# EAGLE board RedBoard-Artemis-ATP-Panel (EAGLE 9.4.2), part 1 of 3
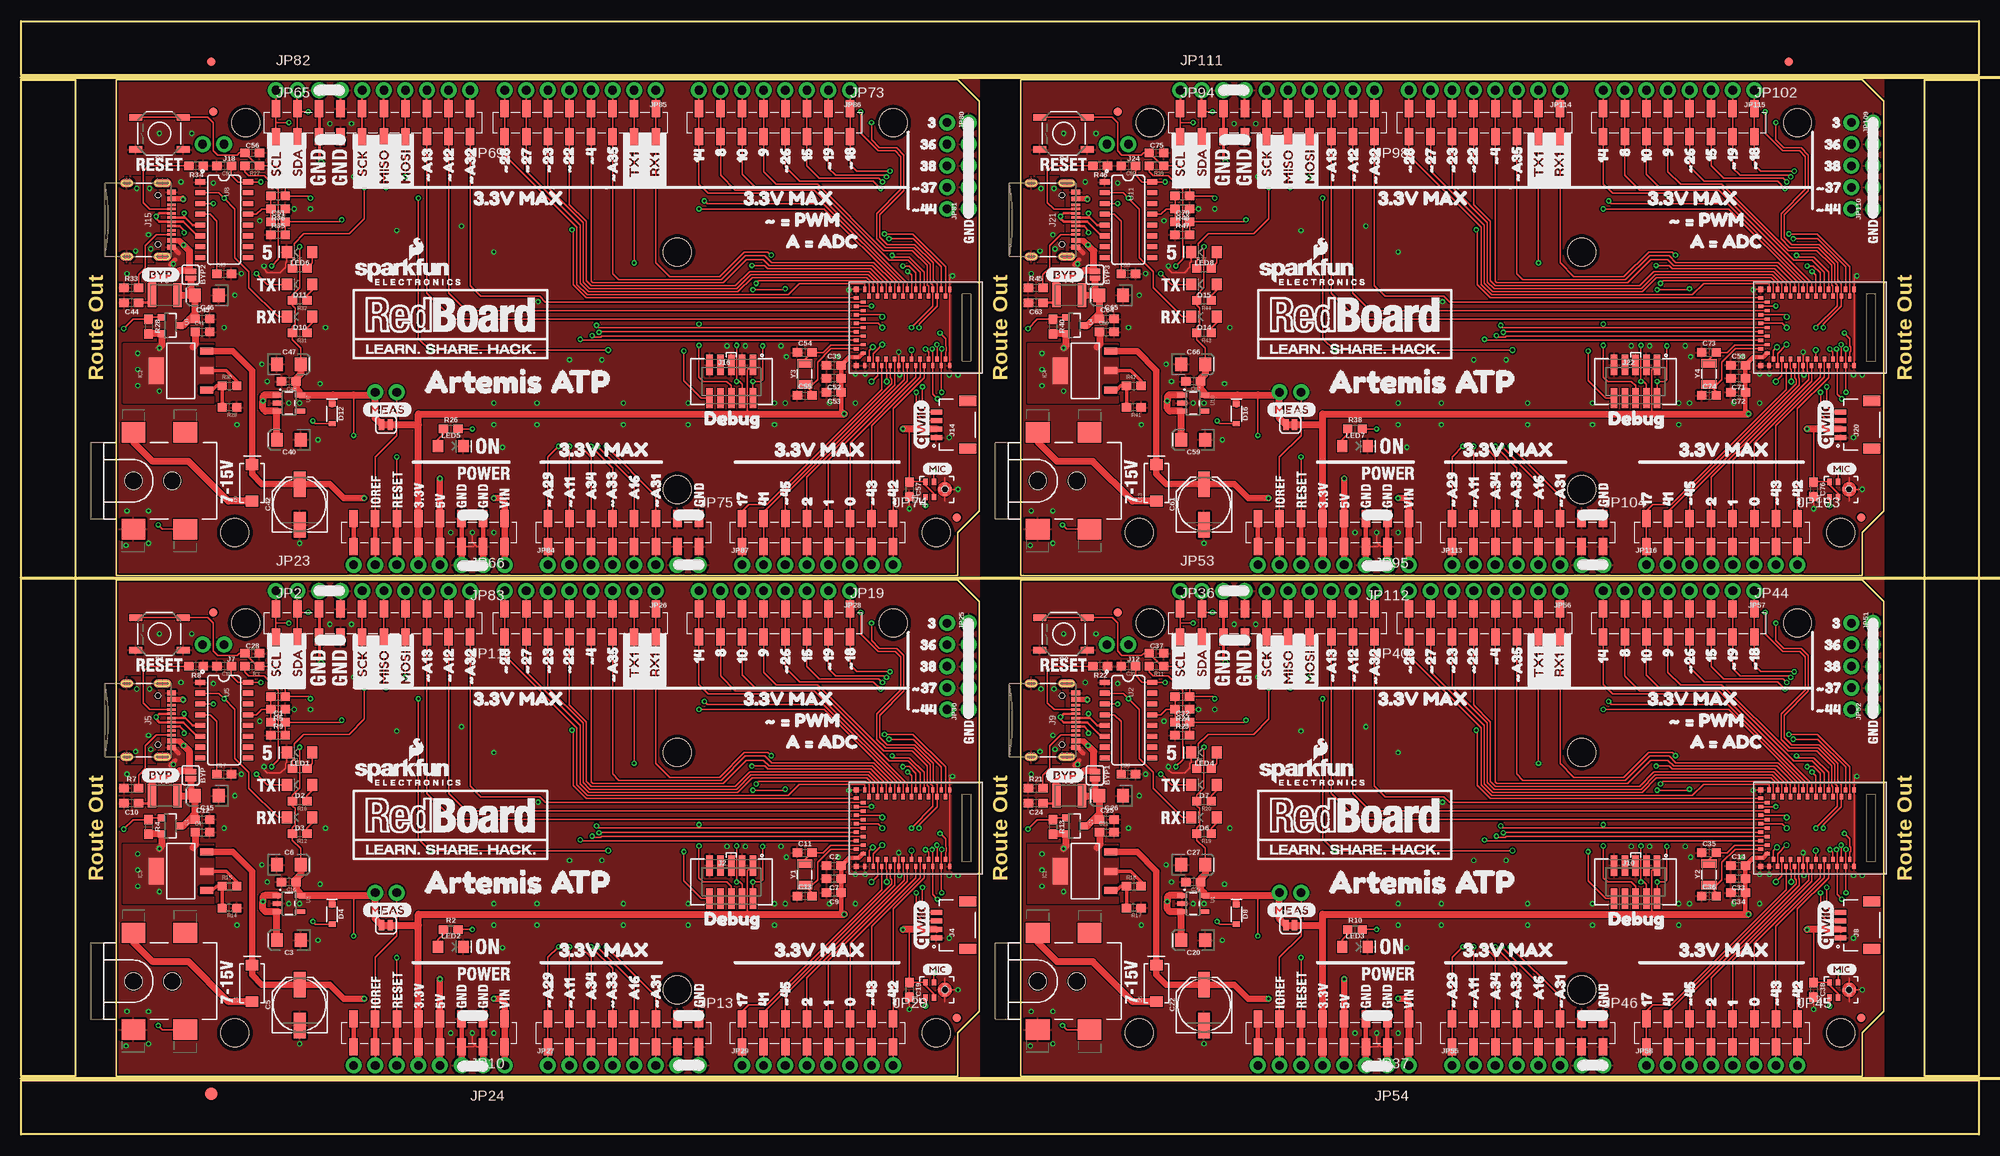
[diagram p0: board, top side]
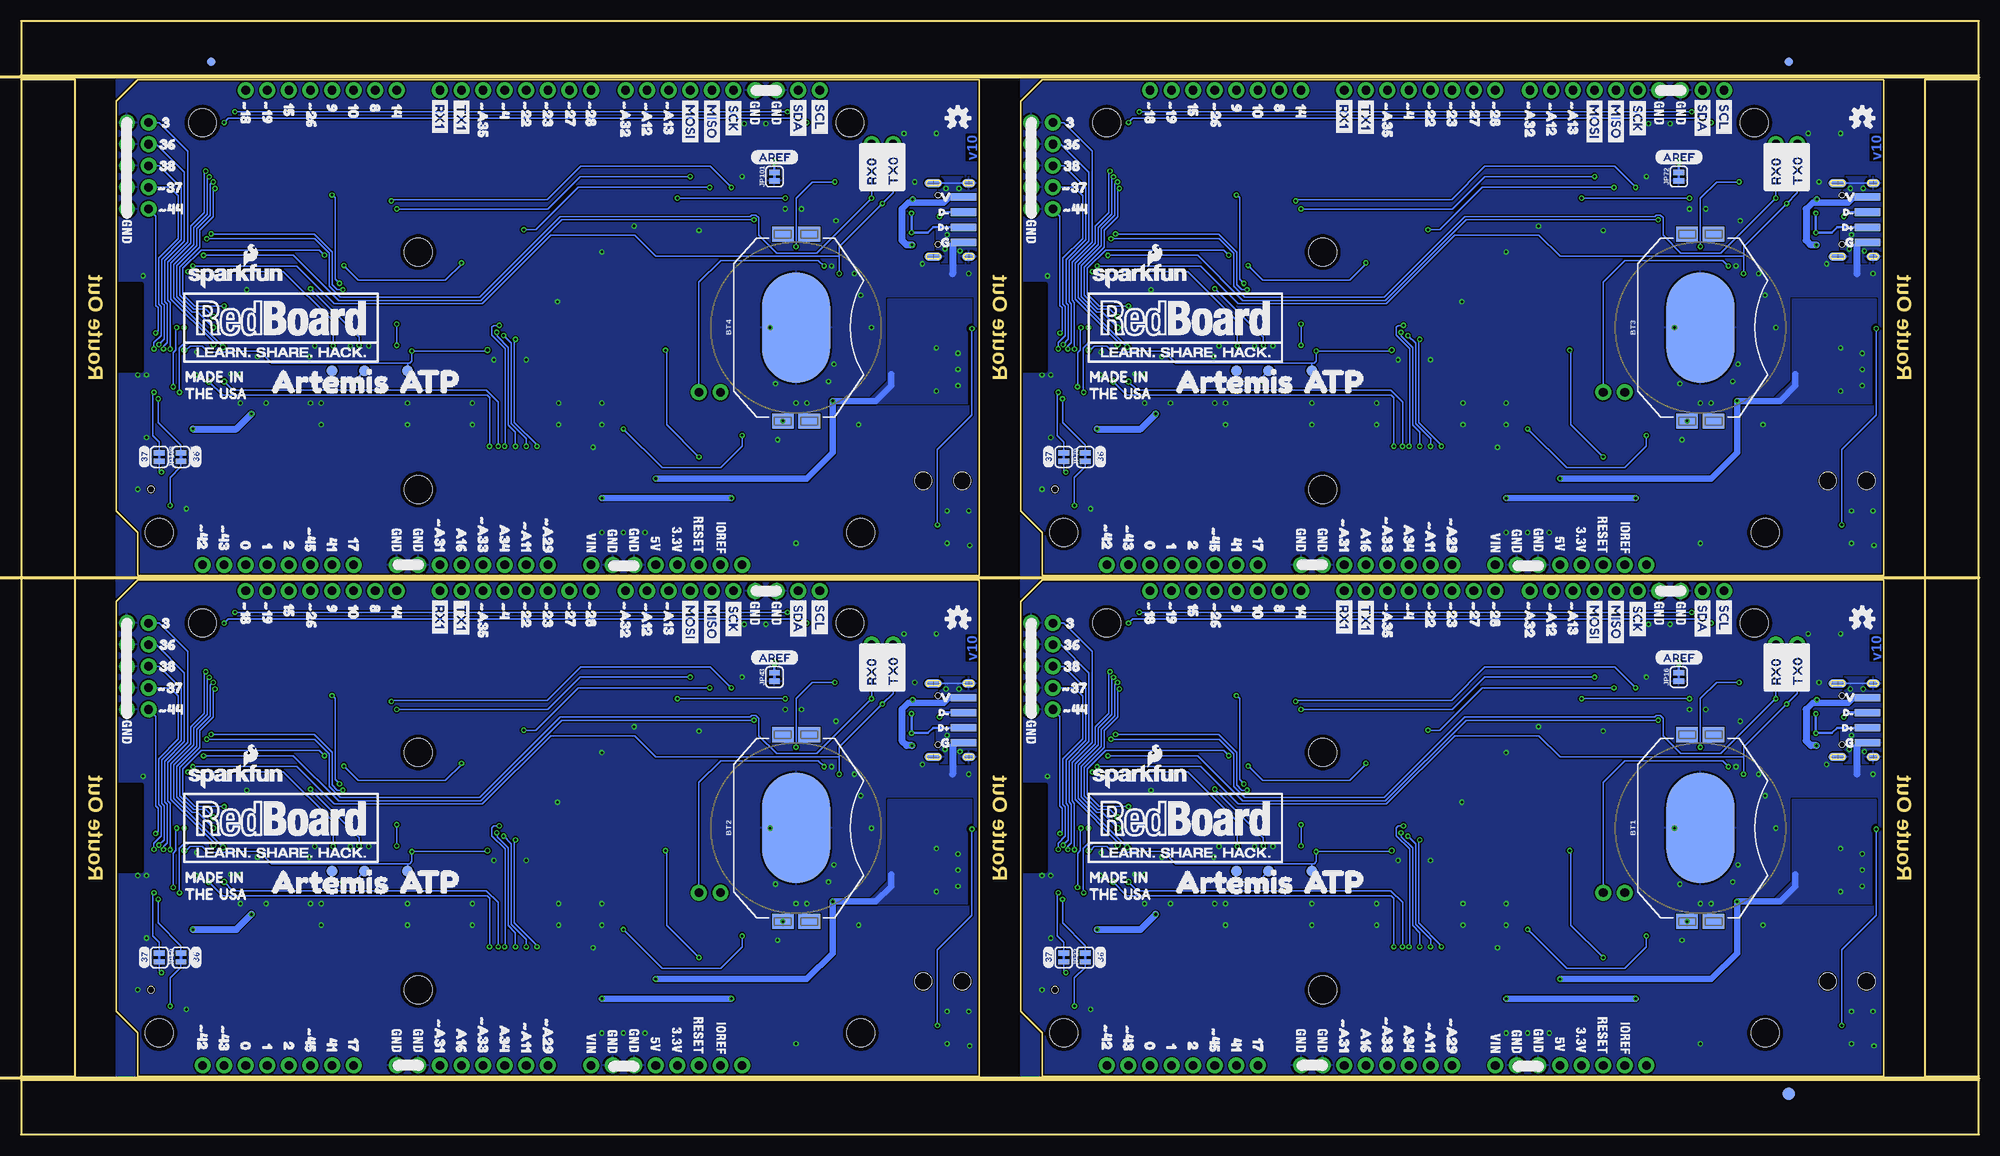
[diagram p1: board, bottom side, seen from below]

Size 230.38 x 131.06 mm. Coordinates in mm from the lower left corner, seen from the top.
Outline: 11.18,65.28 110.24,65.28 112.78,62.74 112.78,14.48 110.24,11.94 110.24,6.86 11.18,6.86 11.18,65.28
Outline: 117.6,65.28 216.66,65.28 219.2,62.74 219.2,14.48 216.66,11.94 216.66,6.86 117.6,6.86 117.6,65.28
Outline: 11.18,124.21 110.24,124.21 112.78,121.67 112.78,73.41 110.24,70.87 110.24,65.79 11.18,65.79 11.18,124.21
Outline: 117.6,124.21 216.66,124.21 219.2,121.67 219.2,73.41 216.66,70.87 216.66,65.79 117.6,65.79 117.6,124.21
Outline: 0,6.35 230.38,6.35 230.38,0 0,0 0,6.35
Outline: 224.03,124.21 230.38,124.21 230.38,6.86 224.03,6.86 224.03,124.21
Outline: 0,131.06 230.38,131.06 230.38,124.71 0,124.71 0,131.06
Outline: 0,124.21 6.35,124.21 6.35,6.86 0,6.86 0,124.21
Copper layers (1*16): Top 0.035mm / dielectric 1.5mm / Bottom 0.035mm
Design rules "SparkFun-2-layer-PCBWay-LIMIT": minimum track width 6mil, minimum drill 0.3mm, track to track 6mil, track to pad 6mil, pad to pad 6mil, via to via 6mil, smd to smd 6mil, copper to edge 6mil, drill to drill 6mil, minimum pad ring 6mil, minimum via ring 6mil, stop-mask expansion 4mil, vias tented up to drill 25mil, thermal gap 10mil
Net classes: 0 default: width 0 mm, drill 0 mm; 1 power: width 0.762 mm
tRestrict: area 109.8,31 to 113,41.2; area 216.2,31 to 219.4,41.2; area 109.8,89.9 to 113,100.1; area 216.2,89.9 to 219.4,100.1
bRestrict: area 109.8,31 to 113,41.2; area 216.2,31 to 219.4,41.2; area 109.8,89.9 to 113,100.1; area 216.2,89.9 to 219.4,100.1
vRestrict: area 11.8,29.2 to 13.2,37.5; area 16.9,30 to 18.5,37.5; area 59.1,17.7 to 59.7,18.2; area 61.6,17.5 to 62.1,18.4; area 22.5,36.2 to 23.9,38.5; area 11.4,19.8 to 20.6,31.9; area 118.2,29.2 to 119.6,37.5; area 123.3,30 to 125,37.5; area 165.5,17.7 to 166.1,18.2; area 168,17.5 to 168.5,18.4; area 128.9,36.2 to 130.3,38.5; area 117.9,19.8 to 127,31.9; 12 more areas
Milling: 3 lines

## Footprints (pad centres in the part's own frame; a part is rotated, then mirrored left to right if it is on the bottom)
BATTCON_20MM_4LEGS_OVERPASTE = smd 1.778 x 2.54: 1 -11,1.55; 3 11,1.55; P$1 -11,-1.55; P$2 11,-1.55 | smd 13 x 8: 2 0,0
SMT-JUMPER_2_NO_SILK = smd 0.635 x 1.27: 1 -0.406,0; 2 0.406,0
0603 = smd 1.1 x 1: 1 -0.85,0; 2 0.85,0
EIA3216 = smd 1.4 x 1.6: + 1.4,0; - -1.4,0
PANASONIC_D = smd 3 x 1.4: + 2.4,0; - -2.4,0
SMA-DIODE = smd 1.27 x 1.47: A -2.15,0; C 2.15,0
LED-1206 = smd 1.2 x 1.4: A -1.5,0; C 1.5,0
SOD-323 = smd 0.63 x 0.83: A 1.15,0; C -1.15,0
SPH0641LM4H-1_MICROPHONE = smd 0.725 x 0.522: 1 -0.9,1.3; 2 -0.9,0.3; 4 0.9,0.3; 5 0.9,1.3 | smd 0.5 x 0.2: 3 0,-1.65; 8 0,-0.35 | smd 0.2 x 0.5: 6 -0.65,-1; 7 0.65,-1 | hole 0.8: 0,-1
FIDUCIAL-1X2 = smd 1 x 1: 1 0,0
FIDUCIAL-1.5X3 = smd 1.5 x 1.5: 1 0,0
1210 = smd 1 x 2.8: 1 -1.5,0; 2 1.5,0
SOT223-ALT1 = smd 0.838 x 1.524: 1 -2.271,-3.02; 2 0,-3.02; 3 2.288,-3.02 | smd 3.124 x 1.778: 4 0,2.921
1X02_NO_SILK = drill 1.016 pad 1.88: 1 0,0; 2 2.54,0
2X5-SMD-1.27MM = smd 0.76 x 2.4: 1 2.54,1.95; 2 2.54,-1.95; 3 1.27,1.95; 4 1.27,-1.95; 5 0,1.95; 6 0,-1.95; 7 -1.27,1.95; 8 -1.27,-1.95; 9 -2.54,1.95; 10 -2.54,-1.95
POWER_JACK_SMD_OVERPASTE_TOE = smd 2.8 x 2.4: GND 0,-5.7; P$4 6.1,-5.7; VIN0 0,5.7; VIN1 6.1,5.7 | hole 2.032: 0,0; 4.572,0
JST04_1MM_RA = smd 0.6 x 1.35: 1 -1.5,0; 2 -0.5,0; 3 0.5,0; 4 1.5,0 | smd 1.2 x 2: NC1 2.8,-3.675; NC2 -2.8,-3.675
USB-C-16P = smd 0.3 x 1.016: A5 -1.25,0.154; A6 -0.25,0.154; A7 0.25,0.154; A8 1.25,0.154; B5 1.75,0.154; B6 0.75,0.154; B7 -0.75,0.154; B8 -1.75,0.154 | smd 0.6 x 1.016: GND -3.225,0.154; GND2 3.225,0.154 | smd 1 x 2.1: SHLD1 -4.32,-0.915; SHLD2 4.32,-0.915 | smd 1 x 2.1 bottom: SHLD3 -4.32,-0.915; SHLD4 4.32,-0.915 | smd 1 x 1.6: SHLD5 -4.32,-5.095; SHLD8 4.32,-5.095 | smd 1 x 1.6 bottom: SHLD6 -4.32,-5.095; SHLD7 4.32,-5.095 | smd 0.55 x 1.016: VBUS1 -2.45,0.154; VBUS2 2.45,0.154 | hole 0.65: -2.89,-1.445; 2.89,-1.445
1X10_SMD_COMBINED = smd 1 x 2: 1A 0,1.65; 1B 0,-1.65; 2A 2.54,1.65; 2B 2.54,-1.65; 3A 5.08,1.65; 3B 5.08,-1.65; 4A 7.62,1.65; 4B 7.62,-1.65; 5A 10.16,1.65; 5B 10.16,-1.65; 6A 12.7,1.65; 6B 12.7,-1.65; 7A 15.24,1.65; 7B 15.24,-1.65; 8A 17.78,1.65; 8B 17.78,-1.65; 9A 20.32,1.65; 9B 20.32,-1.65; 10A 22.86,1.65; 10B 22.86,-1.65
STAND-OFF = hole 3.302: 0,0
1X08_SMD_COMBINED@1 = smd 1 x 2: 1A 0,1.65; 1B 0,-1.65; 2A 2.54,-1.65; 2B 2.54,1.65; 3A 5.08,1.65; 3B 5.08,-1.65; 4A 7.62,-1.65; 4B 7.62,1.65; 5A 10.16,1.65; 5B 10.16,-1.65; 6A 12.7,-1.65; 6B 12.7,1.65; 7A 15.24,1.65; 7B 15.24,-1.65; 8A 17.78,-1.65; 8B 17.78,1.65
1X08_SMD_COMBINED_NC = smd 1 x 2: 1 -17.78,1.65; 1@2 -17.78,-1.65; 2 -15.24,-1.65; 2@2 -15.24,1.65; 3 -12.7,1.65; 3@2 -12.7,-1.65; 4 -10.16,-1.65; 4@2 -10.16,1.65; 5 -7.62,1.65; 5@2 -7.62,-1.65; 6 -5.08,-1.65; 6@2 -5.08,1.65; 7 -2.54,1.65; 7@2 -2.54,-1.65; 8 0,-1.65; 8@2 0,1.65
SMT-JUMPER_2_NC_TRACE_SILK = smd 0.635 x 1.27: 1 -0.508,0; 2 0.508,0
USB-SOLDER-PADS = smd 3 x 0.9: D+ 0,-0.889; D- 0,0.889; GND 0,-2.667; VBUS 0,2.667
1X10_NO_SILK@1 = drill 1.016 pad 1.88: 1 0,0; 2 2.54,0; 3 5.08,0; 4 7.62,0; 5 10.16,0; 6 12.7,0; 7 15.24,0; 8 17.78,0; 9 20.32,0; 10 22.86,0
1X08_NO_SILK@1 = drill 1.016 pad 1.88: 1 0,0; 2 2.54,0; 3 5.08,0; 4 7.62,0; 5 10.16,0; 6 12.7,0; 7 15.24,0; 8 17.78,0
1X05_NO_SILK = drill 1.016 pad 1.88: 1 0,0; 2 2.54,0; 3 5.08,0; 4 7.62,0; 5 10.16,0
1X08_NO_SILK = drill 1.016 pad 1.88: 1 0,0; 2 2.54,0; 3 5.08,0; 4 7.62,0; 5 10.16,0; 6 12.7,0; 7 15.24,0; 8 17.78,0
SOT23-3 = smd 0.8 x 0.9: 1 -0.95,-1; 2 0.95,-1; 3 0,1.1
TACTILE_SWITCH_SMD_5.2MM = smd 1.524 x 0.762: 1 -2.794,1.905; 2 2.794,1.905; 3 -2.794,-1.905; 4 2.794,-1.905
PAD.03X.05 = smd 1.27 x 1.27: P$1 0,0
SOT23-5 = smd 0.55 x 1.2: 1 -0.95,-1.3; 2 0,-1.3; 3 0.95,-1.3; 4 0.95,1.3; 5 -0.95,1.3
SO016 = smd 0.6 x 1.2: 1 -4.445,-2.8; 2 -3.175,-2.8; 3 -1.905,-2.8; 4 -0.635,-2.8; 5 0.635,-2.8; 6 1.905,-2.8; 7 3.175,-2.8; 8 4.445,-2.8; 9 4.445,2.8; 10 3.175,2.8; 11 1.905,2.8; 12 0.635,2.8; 13 -0.635,2.8; 14 -1.905,2.8; 15 -3.175,2.8; 16 -4.445,2.8
ARTEMIS_FP = smd 0.4 x 0.6: AD16 -4,-3.7; BOOT 1.5,4.5; D0 0.5,-4.5; D1 -0.5,-4.5; D2 -1,-3.7; D3 2,-3.7; D7 -1.5,4.5; D8 -0.5,4.5; D9 2,3.7; D10 1,3.7; D14 -5,3.7; D17 -3.5,-4.5; D36 2.5,-4.5; D38 3,-3.7; D40 2.5,4.5; D41 -2.5,-4.5; GND@1 4.5,4.5; GND@39 -5.5,-4.5; GND@47 -1.5,-4.5; GND@59 4.5,-4.5; RXI-0 3.5,4.5; SWDCK 4,3.7; SWDIO 0,3.7; TXO-0 0.5,4.5; ~AD31 -3,-3.7; ~AD35 -2,3.7; ~D4 -2.5,4.5; ~D5 -1,3.7; ~D18 -4.5,-4.5; ~D19 -5,-3.7; ~D22 -3.5,4.5; ~D23 -4,3.7; ~D24 -3,3.7; ~D27 -4.5,4.5; ~D28 -5.5,4.5; ~D37 3.5,-4.5; ~D39 3,3.7; ~D42 1.5,-4.5; ~D43 1,-3.7; ~D44 4,-3.7; ~D45 -2,-3.7; ~RST 0,-3.7 | smd 0.6 x 0.4: AD34 -6.5,-0.5; D15 -6.5,0.5; VDD@36 -5.7,-3; VDD@37 -6.5,-3.5; XI -6.5,-2.5; XO -5.7,-2; ~AD11 -5.7,-1; ~AD12 -5.7,2; ~AD13 -5.7,1; ~AD29 -6.5,-1.5; ~AD32 -5.7,3; ~AD33/SWO -5.7,0; ~D6 -6.5,3.5; ~D25 -6.5,2.5; ~D26 -6.5,1.5 | smd 0.6 x 0.6: GND@22 -6.5,4.5; GND@38 -6.5,-4.5
CRYSTAL-SMD-3.2X1.5MM = smd 1 x 1.8: P$1 -1.25,0; P$2 1.25,0

## Placement (x,y rotation side)
BT1  CR2032  [BATTCON_20MM_4LEGS_OVERPASTE]  32.77,36.07 90 bottom
BT2  CR2032  [BATTCON_20MM_4LEGS_OVERPASTE]  139.19,36.07 90 bottom
BT3  CR2032  [BATTCON_20MM_4LEGS_OVERPASTE]  32.77,95 90 bottom
BT4  CR2032  [BATTCON_20MM_4LEGS_OVERPASTE]  139.19,95 90 bottom
BYP  BYP  [SMT-JUMPER_2_NO_SILK]  19.94,42.29 270 top
BYP1  BYP  [SMT-JUMPER_2_NO_SILK]  126.36,42.29 270 top
BYP2  BYP  [SMT-JUMPER_2_NO_SILK]  19.94,101.22 270 top
BYP3  BYP  [SMT-JUMPER_2_NO_SILK]  126.36,101.22 270 top
C1  0.1uF  [0603]  30.23,48.51 0 top
C2  0.1uF  [0603]  95.63,31.62 0 top
C3  10uF  [EIA3216]  31.5,22.86 180 top
C4  0.1uF  [0603]  21.34,35.56 0 top
C5  47uF  [PANASONIC_D]  32.77,15.24 90 top
C6  10uF  [EIA3216]  31.5,31.75 0 top
C7  10uF  [0603]  95.63,30.1 180 top
C8  0.1uF  [0603]  30.23,51.56 0 top
C9  1.0uF  [0603]  95.63,28.45 180 top
C10  0.1uF  [0603]  12.95,38.99 180 top
C11  15pF  [0603]  92.2,33.15 0 top
C12  0.1uF  [0603]  21.34,37.08 0 top
C13  15pF  [0603]  92.2,28.07 0 top
C14  0.1uF  [0603]  202.06,31.62 0 top
C15  10uF  [EIA3216]  21.84,39.88 180 top
C16  1.0uF  [0603]  31.5,29.72 180 top
C17  10nF  [0603]  23.88,42.42 0 top
C18  0.1uF  [0603]  23.88,55.12 180 top
C19  0.1uF  [0603]  104.52,17.02 270 top
C20  10uF  [EIA3216]  137.92,22.86 180 top
C21  0.1uF  [0603]  127.76,35.56 0 top
C22  47uF  [PANASONIC_D]  139.19,15.24 90 top
C23  0.1uF  [0603]  136.65,51.56 0 top
C24  0.1uF  [0603]  119.38,38.99 180 top
C25  0.1uF  [0603]  127.76,37.08 0 top
C26  10uF  [EIA3216]  128.27,39.88 180 top
C27  10uF  [EIA3216]  137.92,31.75 0 top
C28  1nF  [0603]  27.18,56.64 0 top
C29  1.0uF  [0603]  137.92,29.72 180 top
C30  10nF  [0603]  130.3,42.42 0 top
C31  0.1uF  [0603]  130.3,55.12 180 top
C32  0.1uF  [0603]  136.65,48.51 0 top
C33  10uF  [0603]  202.06,30.1 180 top
C34  1.0uF  [0603]  202.06,28.45 180 top
C35  15pF  [0603]  198.63,33.15 0 top
C36  15pF  [0603]  198.63,28.07 0 top
C37  1nF  [0603]  133.6,56.64 0 top
C38  0.1uF  [0603]  210.95,17.02 270 top
C39  0.1uF  [0603]  95.63,90.55 0 top
C40  10uF  [EIA3216]  31.5,81.79 180 top
C41  0.1uF  [0603]  21.34,94.49 0 top
C42  47uF  [PANASONIC_D]  32.77,74.17 90 top
C43  0.1uF  [0603]  30.23,110.49 0 top
C44  0.1uF  [0603]  12.95,97.92 180 top
C45  0.1uF  [0603]  21.34,96.01 0 top
C46  10uF  [EIA3216]  21.84,98.81 180 top
C47  10uF  [EIA3216]  31.5,90.68 0 top
C48  1.0uF  [0603]  31.5,88.65 180 top
C49  10nF  [0603]  23.88,101.35 0 top
C50  0.1uF  [0603]  23.88,114.05 180 top
C51  0.1uF  [0603]  30.23,107.44 0 top
C52  10uF  [0603]  95.63,89.03 180 top
C53  1.0uF  [0603]  95.63,87.38 180 top
C54  15pF  [0603]  92.2,92.08 0 top
C55  15pF  [0603]  92.2,87 0 top
C56  1nF  [0603]  27.18,115.57 0 top
C57  0.1uF  [0603]  104.52,75.95 270 top
C58  0.1uF  [0603]  202.06,90.55 0 top
C59  10uF  [EIA3216]  137.92,81.79 180 top
C60  0.1uF  [0603]  127.76,94.49 0 top
C61  47uF  [PANASONIC_D]  139.19,74.17 90 top
C62  0.1uF  [0603]  136.65,110.49 0 top
C63  0.1uF  [0603]  119.38,97.92 180 top
C64  0.1uF  [0603]  127.76,96.01 0 top
C65  10uF  [EIA3216]  128.27,98.81 180 top
C66  10uF  [EIA3216]  137.92,90.68 0 top
C67  1.0uF  [0603]  137.92,88.65 180 top
C68  10nF  [0603]  130.3,101.35 0 top
C69  0.1uF  [0603]  130.3,114.05 180 top
C70  0.1uF  [0603]  136.65,107.44 0 top
C71  10uF  [0603]  202.06,89.03 180 top
C72  1.0uF  [0603]  202.06,87.38 180 top
C73  15pF  [0603]  198.63,92.08 0 top
C74  15pF  [0603]  198.63,87 0 top
C75  1nF  [0603]  133.6,115.57 0 top
C76  0.1uF  [0603]  210.95,75.95 270 top
D1  1A/40V/500mV  [SMA-DIODE]  27.18,17.78 90 top
D2  GREEN  [LED-1206]  32.77,41.15 180 top
D3  Yellow  [LED-1206]  32.77,37.34 180 top
D4  3A/10V/280mV  [SOD-323]  36.58,25.91 270 top
D5  1A/40V/500mV  [SMA-DIODE]  133.6,17.78 90 top
D6  Yellow  [LED-1206]  139.19,37.34 180 top
D7  GREEN  [LED-1206]  139.19,41.15 180 top
D8  3A/10V/280mV  [SOD-323]  143,25.91 270 top
D9  1A/40V/500mV  [SMA-DIODE]  27.18,76.71 90 top
D10  Yellow  [LED-1206]  32.77,96.27 180 top
D11  GREEN  [LED-1206]  32.77,100.08 180 top
D12  3A/10V/280mV  [SOD-323]  36.58,84.84 270 top
D13  1A/40V/500mV  [SMA-DIODE]  133.6,76.71 90 top
D14  Yellow  [LED-1206]  139.19,96.27 180 top
D15  GREEN  [LED-1206]  139.19,100.08 180 top
D16  3A/10V/280mV  [SOD-323]  143,84.84 270 top
E1  SPH0641LM4H-1  [SPH0641LM4H-1_MICROPHONE]  107.7,17.02 90 top
E2  SPH0641LM4H-1  [SPH0641LM4H-1_MICROPHONE]  214.12,17.02 90 top
E3  SPH0641LM4H-1  [SPH0641LM4H-1_MICROPHONE]  107.7,75.95 90 top
E4  SPH0641LM4H-1  [SPH0641LM4H-1_MICROPHONE]  214.12,75.95 90 top
E$1  [FIDUCIAL-1X2]  22.35,126.3 0 top
E$2  [FIDUCIAL-1X2]  22.35,126.3 0 bottom
E$3  [FIDUCIAL-1X2]  208.03,126.3 0 top
E$4  [FIDUCIAL-1X2]  208.03,126.3 0 bottom
E$5  [FIDUCIAL-1.5X3]  22.35,4.76 0 top
E$6  [FIDUCIAL-1.5X3]  22.35,4.76 0 bottom
F1  6V/2A  [1210]  123.32,39.88 0 top
F2  6V/2A  [1210]  16.89,39.88 0 top
F3  6V/2A  [1210]  16.89,98.81 0 top
F4  6V/2A  [1210]  123.32,98.81 0 top
FRAME1  FRAME-LETTERNO_PACKAGE  [DUMMY]  154.43,30.99 270 bottom
FRAME2  FRAME-LETTERNO_PACKAGE  [DUMMY]  48.01,30.99 270 bottom
FRAME3  FRAME-LETTERNO_PACKAGE  [DUMMY]  48.01,89.92 270 bottom
FRAME4  FRAME-LETTERNO_PACKAGE  [DUMMY]  154.43,89.92 270 bottom
IC1  LM1117  [SOT223-ALT1]  125.22,30.99 90 top
IC2  LM1117  [SOT223-ALT1]  18.8,89.92 90 top
IC3  LM1117  [SOT223-ALT1]  18.8,30.99 90 top
IC4  LM1117  [SOT223-ALT1]  125.22,89.92 90 top
J1  [1X02_NO_SILK]  44.2,28.45 180 top
J2  CORTEX_DEBUG  [2X5-SMD-1.27MM]  83.57,29.72 0 top
J3  POWER_JACKTOE  [POWER_JACK_SMD_OVERPASTE_TOE]  13.21,18.03 0 top
J4  [JST04_1MM_RA]  107.7,24.64 90 top
J5  USB-C  [USB-C-16P]  17.53,48.77 270 top
J6  POWER_JACKTOE  [POWER_JACK_SMD_OVERPASTE_TOE]  119.63,18.03 0 top
J7  [1X02_NO_SILK]  23.88,57.66 180 top
J8  [JST04_1MM_RA]  214.12,24.64 90 top
J9  USB-C  [USB-C-16P]  123.95,48.77 270 top
J10  CORTEX_DEBUG  [2X5-SMD-1.27MM]  189.99,29.72 0 top
J11  [1X02_NO_SILK]  150.62,28.45 180 top
J12  [1X02_NO_SILK]  130.3,57.66 180 top
J13  POWER_JACKTOE  [POWER_JACK_SMD_OVERPASTE_TOE]  13.21,76.96 0 top
J14  [JST04_1MM_RA]  107.7,83.57 90 top
J15  USB-C  [USB-C-16P]  17.53,107.7 270 top
J16  CORTEX_DEBUG  [2X5-SMD-1.27MM]  83.57,88.65 0 top
J17  [1X02_NO_SILK]  44.2,87.38 180 top
J18  [1X02_NO_SILK]  23.88,116.59 180 top
J19  POWER_JACKTOE  [POWER_JACK_SMD_OVERPASTE_TOE]  119.63,76.96 0 top
J20  [JST04_1MM_RA]  214.12,83.57 90 top
J21  USB-C  [USB-C-16P]  123.95,107.7 270 top
J22  CORTEX_DEBUG  [2X5-SMD-1.27MM]  189.99,88.65 0 top
J23  [1X02_NO_SILK]  150.62,87.38 180 top
J24  [1X02_NO_SILK]  130.3,116.59 180 top
JP1  SFE_LOGO_NAME.1_INCH  [SFE_LOGO_NAME_.1]  44.83,42.8 0 top
JP2  [1X10_SMD_COMBINED]  29.97,60.2 0 top
JP3  STAND-OFF  [STAND-OFF]  25.15,11.94 0 top
JP4  STAND-OFF  [STAND-OFF]  77.22,17.02 0 top
JP5  STAND-OFF  [STAND-OFF]  77.22,44.96 0 top
JP6  STAND-OFF  [STAND-OFF]  26.42,60.2 0 top
JP7  SFE_LOGO_FLAME.1_INCH  [SFE_LOGO_FLAME_.1]  46.48,45.34 0 top
JP8  FIDUCIAL1X2  [FIDUCIAL-1X2]  110.11,13.72 0 top
JP9  FIDUCIAL1X2  [FIDUCIAL-1X2]  22.61,61.47 0 top
JP10  [1X08_SMD_COMBINED@1]  56.9,11.94 180 top
JP11  [1X08_SMD_COMBINED_NC]  56.9,60.2 180 top
JP12  MEAS  [SMT-JUMPER_2_NC_TRACE_SILK]  42.93,24.64 0 top
JP13  [1X08_SMD_COMBINED_NC]  79.76,11.94 0 top
JP14  USB_SOLDER_PADS  [USB-SOLDER-PADS]  13.08,48.77 0 bottom
JP15  STAND-OFF  [STAND-OFF]  131.57,11.94 0 top
JP16  [SMT-JUMPER_2_NC_TRACE_SILK]  35.31,53.85 90 bottom
JP17  STAND-OFF  [STAND-OFF]  107.7,11.94 0 top
JP18  STAND-OFF  [STAND-OFF]  102.62,60.2 0 top
JP19  [1X08_SMD_COMBINED_NC]  97.54,60.2 0 top
JP20  [1X08_SMD_COMBINED_NC]  102.62,11.94 0 top
JP21  [SMT-JUMPER_2_NC_TRACE_SILK]  105.16,20.83 270 bottom
JP22  [SMT-JUMPER_2_NC_TRACE_SILK]  107.7,20.83 270 bottom
JP23  M10NO_SILK  [1X10_NO_SILK@1]  29.97,64.01 0 top
JP24  [1X08_NO_SILK@1]  56.9,8.13 180 top
JP25  [1X05_NO_SILK]  108.97,60.2 270 top
JP26  [1X08_NO_SILK]  74.68,64.01 180 top
JP27  [1X08_NO_SILK]  61.98,8.13 0 top
JP28  [1X08_NO_SILK]  97.54,64.01 180 top
JP29  [1X08_NO_SILK]  84.84,8.13 0 top
JP30  [1X05_NO_SILK]  111.51,50.04 90 top
JP31  STAND-OFF  [STAND-OFF]  183.64,17.02 0 top
JP32  STAND-OFF  [STAND-OFF]  183.64,44.96 0 top
JP33  STAND-OFF  [STAND-OFF]  132.84,60.2 0 top
JP34  FIDUCIAL1X2  [FIDUCIAL-1X2]  216.53,13.72 0 top
JP35  FIDUCIAL1X2  [FIDUCIAL-1X2]  129.03,61.47 0 top
JP36  [1X10_SMD_COMBINED]  136.4,60.2 0 top
JP37  [1X08_SMD_COMBINED@1]  163.32,11.94 180 top
JP38  SFE_LOGO_NAME.1_INCH  [SFE_LOGO_NAME_.1]  151.26,42.8 0 top
JP39  SFE_LOGO_FLAME.1_INCH  [SFE_LOGO_FLAME_.1]  152.91,45.34 0 top
JP40  [1X08_SMD_COMBINED_NC]  163.32,60.2 180 top
JP41  USB_SOLDER_PADS  [USB-SOLDER-PADS]  119.51,48.77 0 bottom
JP42  MEAS  [SMT-JUMPER_2_NC_TRACE_SILK]  149.35,24.64 0 top
JP43  [SMT-JUMPER_2_NC_TRACE_SILK]  141.73,53.85 90 bottom
JP44  [1X08_SMD_COMBINED_NC]  203.96,60.2 0 top
JP45  [1X08_SMD_COMBINED_NC]  209.04,11.94 0 top
JP46  [1X08_SMD_COMBINED_NC]  186.18,11.94 0 top
JP47  STAND-OFF  [STAND-OFF]  214.12,11.94 0 top
JP48  STAND-OFF  [STAND-OFF]  209.04,60.2 0 top
JP49  [SMT-JUMPER_2_NC_TRACE_SILK]  211.58,20.83 270 bottom
JP50  [SMT-JUMPER_2_NC_TRACE_SILK]  214.12,20.83 270 bottom
JP51  [1X05_NO_SILK]  215.39,60.2 270 top
JP52  [1X05_NO_SILK]  217.93,50.04 90 top
JP53  M10NO_SILK  [1X10_NO_SILK@1]  136.4,64.01 0 top
JP54  [1X08_NO_SILK@1]  163.32,8.13 180 top
JP55  [1X08_NO_SILK]  168.4,8.13 0 top
JP56  [1X08_NO_SILK]  181.1,64.01 180 top
JP57  [1X08_NO_SILK]  203.96,64.01 180 top
JP58  [1X08_NO_SILK]  191.26,8.13 0 top
JP59  STAND-OFF  [STAND-OFF]  25.15,70.87 0 top
JP60  STAND-OFF  [STAND-OFF]  77.22,75.95 0 top
JP61  STAND-OFF  [STAND-OFF]  77.22,103.89 0 top
JP62  STAND-OFF  [STAND-OFF]  26.42,119.13 0 top
JP63  FIDUCIAL1X2  [FIDUCIAL-1X2]  110.11,72.64 0 top
JP64  FIDUCIAL1X2  [FIDUCIAL-1X2]  22.61,120.4 0 top
JP65  [1X10_SMD_COMBINED]  29.97,119.13 0 top
JP66  [1X08_SMD_COMBINED@1]  56.9,70.87 180 top
JP67  SFE_LOGO_NAME.1_INCH  [SFE_LOGO_NAME_.1]  44.83,101.73 0 top
JP68  SFE_LOGO_FLAME.1_INCH  [SFE_LOGO_FLAME_.1]  46.48,104.27 0 top
JP69  [1X08_SMD_COMBINED_NC]  56.9,119.13 180 top
JP70  USB_SOLDER_PADS  [USB-SOLDER-PADS]  13.08,107.7 0 bottom
JP71  MEAS  [SMT-JUMPER_2_NC_TRACE_SILK]  42.93,83.57 0 top
JP72  [SMT-JUMPER_2_NC_TRACE_SILK]  35.31,112.78 90 bottom
JP73  [1X08_SMD_COMBINED_NC]  97.54,119.13 0 top
JP74  [1X08_SMD_COMBINED_NC]  102.62,70.87 0 top
JP75  [1X08_SMD_COMBINED_NC]  79.76,70.87 0 top
JP76  STAND-OFF  [STAND-OFF]  107.7,70.87 0 top
JP77  STAND-OFF  [STAND-OFF]  102.62,119.13 0 top
JP78  [SMT-JUMPER_2_NC_TRACE_SILK]  105.16,79.76 270 bottom
JP79  [SMT-JUMPER_2_NC_TRACE_SILK]  107.7,79.76 270 bottom
JP80  [1X05_NO_SILK]  108.97,119.13 270 top
JP81  [1X05_NO_SILK]  111.51,108.97 90 top
JP82  M10NO_SILK  [1X10_NO_SILK@1]  29.97,122.94 0 top
JP83  [1X08_NO_SILK@1]  56.9,67.06 180 top
JP84  [1X08_NO_SILK]  61.98,67.06 0 top
JP85  [1X08_NO_SILK]  74.68,122.94 180 top
JP86  [1X08_NO_SILK]  97.54,122.94 180 top
JP87  [1X08_NO_SILK]  84.84,67.06 0 top
JP88  STAND-OFF  [STAND-OFF]  131.57,70.87 0 top
JP89  STAND-OFF  [STAND-OFF]  183.64,75.95 0 top
JP90  STAND-OFF  [STAND-OFF]  183.64,103.89 0 top
JP91  STAND-OFF  [STAND-OFF]  132.84,119.13 0 top
JP92  FIDUCIAL1X2  [FIDUCIAL-1X2]  216.53,72.64 0 top
JP93  FIDUCIAL1X2  [FIDUCIAL-1X2]  129.03,120.4 0 top
JP94  [1X10_SMD_COMBINED]  136.4,119.13 0 top
JP95  [1X08_SMD_COMBINED@1]  163.32,70.87 180 top
JP96  SFE_LOGO_NAME.1_INCH  [SFE_LOGO_NAME_.1]  151.26,101.73 0 top
JP97  SFE_LOGO_FLAME.1_INCH  [SFE_LOGO_FLAME_.1]  152.91,104.27 0 top
JP98  [1X08_SMD_COMBINED_NC]  163.32,119.13 180 top
JP99  USB_SOLDER_PADS  [USB-SOLDER-PADS]  119.51,107.7 0 bottom
JP100  MEAS  [SMT-JUMPER_2_NC_TRACE_SILK]  149.35,83.57 0 top
JP101  [SMT-JUMPER_2_NC_TRACE_SILK]  141.73,112.78 90 bottom
JP102  [1X08_SMD_COMBINED_NC]  203.96,119.13 0 top
JP103  [1X08_SMD_COMBINED_NC]  209.04,70.87 0 top
JP104  [1X08_SMD_COMBINED_NC]  186.18,70.87 0 top
JP105  STAND-OFF  [STAND-OFF]  214.12,70.87 0 top
JP106  STAND-OFF  [STAND-OFF]  209.04,119.13 0 top
JP107  [SMT-JUMPER_2_NC_TRACE_SILK]  211.58,79.76 270 bottom
JP108  [SMT-JUMPER_2_NC_TRACE_SILK]  214.12,79.76 270 bottom
JP109  [1X05_NO_SILK]  215.39,119.13 270 top
JP110  [1X05_NO_SILK]  217.93,108.97 90 top
JP111  M10NO_SILK  [1X10_NO_SILK@1]  136.4,122.94 0 top
JP112  [1X08_NO_SILK@1]  163.32,67.06 180 top
JP113  [1X08_NO_SILK]  168.4,67.06 0 top
JP114  [1X08_NO_SILK]  181.1,122.94 180 top
JP115  [1X08_NO_SILK]  203.96,122.94 180 top
JP116  [1X08_NO_SILK]  191.26,67.06 0 top
LED1  BLUE  [LED-1206]  32.77,44.96 180 top
LED2  GREEN  [LED-1206]  50.55,22.1 0 top
LED3  GREEN  [LED-1206]  156.97,22.1 0 top
LED4  BLUE  [LED-1206]  139.19,44.96 180 top
LED5  GREEN  [LED-1206]  50.55,81.03 0 top
LED6  BLUE  [LED-1206]  32.77,103.89 180 top
LED7  GREEN  [LED-1206]  156.97,81.03 0 top
LED8  BLUE  [LED-1206]  139.19,103.89 180 top
LOGO1  SFE_LOGO_NAME_FLAME.1_INCH  [SFE_LOGO_NAME_FLAME_.1]  98.68,42.16 0 bottom
LOGO2  SFE_LOGO_NAME_FLAME.1_INCH  [SFE_LOGO_NAME_FLAME_.1]  205.1,42.16 0 bottom
LOGO3  SFE_LOGO_NAME_FLAME.1_INCH  [SFE_LOGO_NAME_FLAME_.1]  98.68,101.09 0 bottom
LOGO4  SFE_LOGO_NAME_FLAME.1_INCH  [SFE_LOGO_NAME_FLAME_.1]  205.1,101.09 0 bottom
Q1  2.5A/30V/105mΩ  [SOT23-3]  17.53,36.32 270 top
Q2  2.5A/30V/105mΩ  [SOT23-3]  123.95,36.32 270 top
Q3  2.5A/30V/105mΩ  [SOT23-3]  17.53,95.25 270 top
Q4  2.5A/30V/105mΩ  [SOT23-3]  123.95,95.25 270 top
R1  4.7k  [0603]  32.77,43.05 0 top
R2  10k  [0603]  50.55,24.13 0 top
R3  100k  [0603]  27.18,55.12 180 top
R4  10k  [0603]  14.99,36.2 270 top
R5  [0603]  30.23,50.04 180 top
R6  4.7k  [0603]  139.19,43.05 0 top
R7  5.1k  [0603]  12.95,40.77 0 top
R8  5.1k  [0603]  20.57,55.12 180 top
R9  220k  [0603]  30.23,46.99 0 top
R10  10k  [0603]  156.97,24.13 0 top
R11  100k  [0603]  133.6,55.12 180 top
R12  4.7k  [0603]  32.77,35.43 180 top
R13  10k  [0603]  121.41,36.2 270 top
R14  715  [0603]  24.51,26.67 180 top
R15  240  [0603]  24.51,29.21 0 top
R16  4.7k  [0603]  32.77,39.24 180 top
R17  715  [0603]  130.94,26.67 180 top
R18  240  [0603]  130.94,29.21 0 top
R19  4.7k  [0603]  139.19,35.43 180 top
R20  4.7k  [0603]  139.19,39.24 180 top
R21  5.1k  [0603]  119.38,40.77 0 top
R22  5.1k  [0603]  127,55.12 180 top
R23  220k  [0603]  136.65,46.99 0 top
R24  [0603]  136.65,50.04 180 top
R25  4.7k  [0603]  32.77,101.98 0 top
R26  10k  [0603]  50.55,83.06 0 top
R27  100k  [0603]  27.18,114.05 180 top
R28  10k  [0603]  14.99,95.12 270 top
R29  715  [0603]  24.51,85.6 180 top
R30  240  [0603]  24.51,88.14 0 top
R31  4.7k  [0603]  32.77,94.36 180 top
R32  4.7k  [0603]  32.77,98.17 180 top
R33  5.1k  [0603]  12.95,99.7 0 top
R34  5.1k  [0603]  20.57,114.05 180 top
R35  220k  [0603]  30.23,105.92 0 top
R36  [0603]  30.23,108.97 180 top
R37  4.7k  [0603]  139.19,101.98 0 top
R38  10k  [0603]  156.97,83.06 0 top
R39  100k  [0603]  133.6,114.05 180 top
R40  10k  [0603]  121.41,95.12 270 top
R41  715  [0603]  130.94,85.6 180 top
R42  240  [0603]  130.94,88.14 0 top
R43  4.7k  [0603]  139.19,94.36 180 top
R44  4.7k  [0603]  139.19,98.17 180 top
R45  5.1k  [0603]  119.38,99.7 0 top
R46  5.1k  [0603]  127,114.05 180 top
R47  220k  [0603]  136.65,105.92 0 top
R48  [0603]  136.65,108.97 180 top
S1  [TACTILE_SWITCH_SMD_5.2MM]  16.26,58.93 180 top
S2  [TACTILE_SWITCH_SMD_5.2MM]  122.68,58.93 180 top
S3  [TACTILE_SWITCH_SMD_5.2MM]  16.26,117.86 180 top
S4  [TACTILE_SWITCH_SMD_5.2MM]  122.68,117.86 180 top
TP1  [PAD.03X.05]  83.57,30.99 90 bottom
TP2  [PAD.03X.05]  87.38,30.99 90 bottom
TP3  [PAD.03X.05]  78.49,30.99 0 bottom
TP4  [PAD.03X.05]  189.99,30.99 90 bottom
TP5  [PAD.03X.05]  193.8,30.99 90 bottom
TP6  [PAD.03X.05]  184.91,30.99 0 bottom
TP7  [PAD.03X.05]  83.57,89.92 90 bottom
TP8  [PAD.03X.05]  87.38,89.92 90 bottom
TP9  [PAD.03X.05]  78.49,89.92 0 bottom
TP10  [PAD.03X.05]  189.99,89.92 90 bottom
TP11  [PAD.03X.05]  193.8,89.92 90 bottom
TP12  [PAD.03X.05]  184.91,89.92 0 bottom
U1  AP2112-3.3V  [SOT23-5]  137.92,27.18 270 top
U2  CH340C  [SO016]  130.3,48.77 270 top
U3  AP2112-3.3V  [SOT23-5]  31.5,27.18 270 top
U4  ARTEMIS_MODULESMD  [ARTEMIS_FP]  104.78,36.07 0 top
U5  CH340C  [SO016]  23.88,48.77 270 top
U6  ARTEMIS_MODULESMD  [ARTEMIS_FP]  211.2,36.07 0 top
U7  AP2112-3.3V  [SOT23-5]  31.5,86.11 270 top
U8  CH340C  [SO016]  23.88,107.7 270 top
U9  ARTEMIS_MODULESMD  [ARTEMIS_FP]  104.78,95 0 top
U10  AP2112-3.3V  [SOT23-5]  137.92,86.11 270 top
U11  CH340C  [SO016]  130.3,107.7 270 top
U12  ARTEMIS_MODULESMD  [ARTEMIS_FP]  211.2,95 0 top
U$1  [3#3V_MAX2]  61.85,21.72 0 top
U$2  [D#3]  16.76,47.88 0 bottom
U$3  [1720]  84.84,12.32 270 bottom
U$4  [MADEINUSA#PNG]  101.09,29.21 0 bottom
U$5  OSHW-LOGOS  [OSHW-LOGO-S]  120.14,60.71 0 bottom
U$6  [MADEINUSA#PNG]  207.52,29.21 0 bottom
U$7  [QWIIC_COPYRIGHT_SMALL]  212.34,24.64 90 top
U$8  [G1]  123.06,46.1 0 bottom
U$9  [QWIIC_COPYRIGHT_SMALL]  105.92,24.64 90 top
U$10  [D#4]  16.64,49.66 0 bottom
U$11  [G1]  16.64,46.1 0 bottom
U$12  [V0]  16.64,51.43 0 bottom
U$13  [#A332]  69.47,13.84 90 top
U$14  [ARTEMIS0]  45.21,29.72 0 top
U$15  [ARTEMIS0]  96.77,29.72 0 bottom
U$16  OSHW-LOGOS  [OSHW-LOGO-S]  13.72,60.71 0 bottom
U$17  [A160]  72.14,14.86 90 top
U$18  [SCL1]  29.97,52.83 90 top
U$19  [#48]  67.06,54.23 90 top
U$20  [AREF2]  38.1,56.13 0 bottom
U$21  [#229]  64.39,53.21 90 top
U$22  [SDA0]  32.51,52.83 90 top
U$23  [#3711]  103.76,52.58 0 top
U$24  [#187]  97.54,53.59 90 top
U$25  [#2310]  61.98,53.21 90 top
U$26  [#2711]  59.44,53.21 90 top
U$27  [#2812]  56.9,53.21 90 top
U$28  [ATP1]  81.66,29.72 0 bottom
U$29  [#A113]  64.52,13.84 90 top
U$30  [#A294]  61.98,13.84 90 top
U$31  [#A310]  74.68,13.84 90 top
U$32  [#196]  95,53.59 90 top
U$33  [#A357]  69.6,52.2 90 top
U$34  [#A1214]  50.29,52.2 90 top
U$35  [#A1315]  47.75,52.2 90 top
U$36  [#A3213]  52.83,51.94 90 top
U$37  [#264]  89.92,53.21 90 top
U$38  [A342]  67.06,14.86 90 top
U$39  [#4213]  102.62,14.1 90 top
U$40  [#4314]  100.08,14.1 90 top
U$41  [#4412]  103.76,50.04 0 top
U$42  [#4518]  89.92,14.1 90 top
U$43  [015]  97.54,14.1 90 top
U$44  [38]  105.66,60.2 0 top
U$45  [81]  82.3,55.24 90 top
U$46  [93]  87.38,55.24 90 top
U$47  [MISO8]  42.67,51.94 90 top
U$48  [MOSI7]  45.21,51.94 90 top
U$49  [RX01]  23.88,51.82 90 bottom
U$50  [SCK9]  40.13,52.83 90 top
U$51  [102]  84.84,54.48 90 top
U$52  [116]  95,14.1 90 top
U$53  [TX00]  21.34,51.82 90 bottom
U$54  [140]  79.76,54.48 90 top
U$55  [155]  92.46,54.61 90 top
U$56  [217]  92.46,14.1 90 top
U$57  [369]  104.78,57.66 0 top
U$58  [1720]  84.84,14.1 90 top
U$59  [3810]  104.78,55.12 0 top
U$60  [4119]  87.38,14.1 90 top
U$61  [ATP1]  60.07,29.72 0 top
U$62  [MIC0]  106.05,19.43 0 top
U$63  [364]  103.38,19.56 90 bottom
U$64  [373]  109.47,19.56 90 bottom
U$65  [3#3V_MAX2]  87.25,21.72 0 top
U$66  [#_#_PWM7]  86.11,48.77 0 top
U$67  [3#3V_MAX2]  51.82,51.31 0 top
U$68  [BYP0]  14.1,42.29 0 top
U$69  [A_#_ADC6]  88.65,46.23 0 top
U$70  [MEAS3]  40.13,26.42 0 top
U$71  [RX11]  74.55,52.83 90 top
U$72  [TX10]  72.14,52.7 90 top
U$73  [3#3V_MAX2]  83.57,51.31 0 top
U$74  [4119]  87.38,12.32 270 bottom
U$75  [#4518]  89.92,13.59 270 bottom
U$76  [DEBUG2]  78.99,25.4 0 top
U$77  [217]  92.46,11.94 270 bottom
U$78  [116]  95,11.68 270 bottom
U$79  [015]  97.54,11.94 270 bottom
U$80  [#4314]  100.08,13.84 270 bottom
U$81  [#4213]  102.62,13.97 270 bottom
U$82  [140]  79.76,63.37 270 bottom
U$83  [81]  82.3,63.37 270 bottom
U$84  [102]  84.84,63.37 270 bottom
U$85  [93]  87.38,63.37 270 bottom
U$86  [#264]  89.79,63.63 270 bottom
U$87  [155]  92.46,63.5 270 bottom
U$88  [#196]  95,63.75 270 bottom
U$89  [#187]  97.54,63.75 270 bottom
U$90  [38]  108.46,60.2 0 bottom
U$91  [369]  108.71,57.66 0 bottom
U$92  [3810]  108.71,55.12 0 bottom
U$93  [#3711]  108.97,52.58 0 bottom
U$94  [#4412]  108.84,50.04 0 bottom
U$95  [#A357]  69.6,63.63 270 bottom
U$96  [#48]  67.06,63.63 270 bottom
U$97  [#229]  64.52,63.75 270 bottom
U$98  [#2310]  61.98,63.75 270 bottom
U$99  [#2812]  56.9,63.75 270 bottom
U$100  [#2711]  59.31,63.75 270 bottom
U$101  [#A3213]  52.83,63.75 270 bottom
U$102  [#A1214]  50.29,63.63 270 bottom
U$103  [#A1315]  47.75,63.75 270 bottom
U$104  [MOSI7]  45.21,63.37 270 bottom
U$105  [MISO8]  42.67,63.37 270 bottom
U$106  [SCK9]  40.13,63.25 270 bottom
U$107  [SDA0]  32.51,63.37 270 bottom
U$108  [SCL1]  29.97,63.37 270 bottom
U$109  [#A294]  61.98,14.73 270 bottom
U$110  [#A113]  64.52,14.22 270 bottom
U$111  [A342]  67.06,13.84 270 bottom
U$112  [#A332]  69.6,14.86 270 bottom
U$113  [A160]  72.14,13.46 270 bottom
U$114  [#A310]  74.68,14.61 270 bottom
U$115  [RX11]  74.68,63.37 270 bottom
U$116  [TX10]  72.14,63.37 270 bottom
U$117  [V0]  123.06,51.43 0 bottom
U$118  [D#3]  123.19,47.88 0 bottom
U$119  [D#4]  123.06,49.66 0 bottom
U$120  [ARTEMIS0]  151.64,29.72 0 top
U$121  [ARTEMIS0]  203.2,29.72 0 bottom
U$122  [A160]  178.56,14.86 90 top
U$123  [#48]  173.48,54.23 90 top
U$124  [#229]  170.81,53.21 90 top
U$125  [#2310]  168.4,53.21 90 top
U$126  [#2711]  165.86,53.21 90 top
U$127  [#2812]  163.32,53.21 90 top
U$128  [#A113]  170.94,13.84 90 top
U$129  [#A294]  168.4,13.84 90 top
U$130  [#A310]  181.1,13.84 90 top
U$131  [#A357]  176.02,52.2 90 top
U$132  [#A1214]  156.72,52.2 90 top
U$133  [#A1315]  154.18,52.2 90 top
U$134  [#A3213]  159.26,51.94 90 top
U$135  [A342]  173.48,14.86 90 top
U$136  [MISO8]  149.1,51.94 90 top
U$137  [MOSI7]  151.64,51.94 90 top
U$138  [SCK9]  146.56,52.83 90 top
U$139  [#_#_PWM7]  192.53,48.77 0 top
U$140  [3#3V_MAX2]  158.24,51.31 0 top
U$141  [A_#_ADC6]  195.07,46.23 0 top
U$142  [MEAS3]  146.56,26.42 0 top
U$143  [RX11]  180.97,52.83 90 top
U$144  [TX10]  178.56,52.7 90 top
U$145  [RX01]  130.3,51.82 90 bottom
U$146  [TX00]  127.76,51.82 90 bottom
U$147  [AREF2]  144.53,56.13 0 bottom
U$148  [SCL1]  136.4,52.83 90 top
U$149  [SDA0]  138.94,52.83 90 top
U$150  [#187]  203.96,53.59 90 top
U$151  [#196]  201.42,53.59 90 top
U$152  [#264]  196.34,53.21 90 top
U$153  [#3711]  210.18,52.58 0 top
U$154  [#4213]  209.04,14.1 90 top
U$155  [#4314]  206.5,14.1 90 top
U$156  [#4412]  210.18,50.04 0 top
U$157  [#4518]  196.34,14.1 90 top
U$158  [015]  203.96,14.1 90 top
U$159  [38]  212.09,60.2 0 top
U$160  [81]  188.72,55.24 90 top
U$161  [93]  193.8,55.24 90 top
U$162  [102]  191.26,54.48 90 top
U$163  [116]  201.42,14.1 90 top
U$164  [140]  186.18,54.48 90 top
U$165  [155]  198.88,54.61 90 top
U$166  [217]  198.88,14.1 90 top
U$167  [369]  211.2,57.66 0 top
U$168  [1720]  191.26,14.1 90 top
U$169  [3810]  211.2,55.12 0 top
U$170  [4119]  193.8,14.1 90 top
U$171  [ATP1]  166.5,29.72 0 top
U$172  [MIC0]  212.47,19.43 0 top
U$173  [364]  209.8,19.56 90 bottom
U$174  [373]  215.9,19.56 90 bottom
U$175  [BYP0]  120.52,42.29 0 top
U$176  [#A332]  175.89,13.84 90 top
U$177  [ATP1]  188.09,29.72 0 bottom
U$178  [3#3V_MAX2]  168.27,21.72 0 top
U$179  [3#3V_MAX2]  193.67,21.72 0 top
U$180  [3#3V_MAX2]  189.99,51.31 0 top
U$181  [DEBUG2]  185.42,25.4 0 top
U$182  [1720]  191.26,12.32 270 bottom
U$183  [4119]  193.8,12.32 270 bottom
U$184  [#4518]  196.34,13.59 270 bottom
U$185  [217]  198.88,11.94 270 bottom
U$186  [116]  201.42,11.68 270 bottom
U$187  [015]  203.96,11.94 270 bottom
U$188  [#4314]  206.5,13.84 270 bottom
U$189  [#4213]  209.04,13.97 270 bottom
U$190  [140]  186.18,63.37 270 bottom
U$191  [81]  188.72,63.37 270 bottom
U$192  [102]  191.26,63.37 270 bottom
U$193  [93]  193.8,63.37 270 bottom
U$194  [#264]  196.21,63.63 270 bottom
U$195  [155]  198.88,63.5 270 bottom
U$196  [#196]  201.42,63.75 270 bottom
U$197  [#187]  203.96,63.75 270 bottom
U$198  [38]  214.88,60.2 0 bottom
U$199  [369]  215.14,57.66 0 bottom
U$200  [3810]  215.14,55.12 0 bottom
U$201  [#3711]  215.39,52.58 0 bottom
U$202  [#4412]  215.26,50.04 0 bottom
U$203  [#A357]  176.02,63.63 270 bottom
U$204  [#48]  173.48,63.63 270 bottom
U$205  [#229]  170.94,63.75 270 bottom
U$206  [#2310]  168.4,63.75 270 bottom
U$207  [#2812]  163.32,63.75 270 bottom
U$208  [#2711]  165.73,63.75 270 bottom
U$209  [#A3213]  159.26,63.75 270 bottom
U$210  [#A1214]  156.72,63.63 270 bottom
U$211  [#A1315]  154.18,63.75 270 bottom
U$212  [MOSI7]  151.64,63.37 270 bottom
U$213  [MISO8]  149.1,63.37 270 bottom
U$214  [SCK9]  146.56,63.25 270 bottom
U$215  [SDA0]  138.94,63.37 270 bottom
U$216  [SCL1]  136.4,63.37 270 bottom
U$217  [#A294]  168.4,14.73 270 bottom
U$218  [#A113]  170.94,14.22 270 bottom
U$219  [A342]  173.48,13.84 270 bottom
U$220  [#A332]  176.02,14.86 270 bottom
U$221  [A160]  178.56,13.46 270 bottom
U$222  [#A310]  181.1,14.61 270 bottom
U$223  [RX11]  181.1,63.37 270 bottom
U$224  [TX10]  178.56,63.37 270 bottom
U$225  OSHW-LOGOS  [OSHW-LOGO-S]  13.72,119.63 0 bottom
U$226  [MADEINUSA#PNG]  101.09,88.14 0 bottom
U$227  [QWIIC_COPYRIGHT_SMALL]  105.92,83.57 90 top
U$228  [G1]  16.64,105.03 0 bottom
U$229  [V0]  16.64,110.36 0 bottom
U$230  [D#3]  16.76,106.81 0 bottom
U$231  [D#4]  16.64,108.59 0 bottom
U$232  [ARTEMIS0]  45.21,88.65 0 top
U$233  [ARTEMIS0]  96.77,88.65 0 bottom
U$234  [A160]  72.14,73.79 90 top
U$235  [#48]  67.06,113.16 90 top
U$236  [#229]  64.39,112.14 90 top
U$237  [#2310]  61.98,112.14 90 top
U$238  [#2711]  59.44,112.14 90 top
U$239  [#2812]  56.9,112.14 90 top
U$240  [#A113]  64.52,72.77 90 top
U$241  [#A294]  61.98,72.77 90 top
U$242  [#A310]  74.68,72.77 90 top
U$243  [#A357]  69.6,111.12 90 top
U$244  [#A1214]  50.29,111.12 90 top
U$245  [#A1315]  47.75,111.12 90 top
U$246  [#A3213]  52.83,110.87 90 top
U$247  [A342]  67.06,73.79 90 top
U$248  [MISO8]  42.67,110.87 90 top
U$249  [MOSI7]  45.21,110.87 90 top
U$250  [SCK9]  40.13,111.76 90 top
U$251  [#_#_PWM7]  86.11,107.7 0 top
U$252  [3#3V_MAX2]  51.82,110.24 0 top
U$253  [A_#_ADC6]  88.65,105.16 0 top
U$254  [MEAS3]  40.13,85.34 0 top
U$255  [RX11]  74.55,111.76 90 top
U$256  [TX10]  72.14,111.63 90 top
U$257  [RX01]  23.88,110.74 90 bottom
U$258  [TX00]  21.34,110.74 90 bottom
U$259  [AREF2]  38.1,115.06 0 bottom
U$260  [SCL1]  29.97,111.76 90 top
U$261  [SDA0]  32.51,111.76 90 top
U$262  [#187]  97.54,112.52 90 top
U$263  [#196]  95,112.52 90 top
U$264  [#264]  89.92,112.14 90 top
U$265  [#3711]  103.76,111.51 0 top
U$266  [#4213]  102.62,73.03 90 top
U$267  [#4314]  100.08,73.03 90 top
U$268  [#4412]  103.76,108.97 0 top
U$269  [#4518]  89.92,73.03 90 top
U$270  [015]  97.54,73.03 90 top
U$271  [38]  105.66,119.13 0 top
U$272  [81]  82.3,114.17 90 top
U$273  [93]  87.38,114.17 90 top
U$274  [102]  84.84,113.41 90 top
U$275  [116]  95,73.03 90 top
U$276  [140]  79.76,113.41 90 top
U$277  [155]  92.46,113.54 90 top
U$278  [217]  92.46,73.03 90 top
U$279  [369]  104.78,116.59 0 top
U$280  [1720]  84.84,73.03 90 top
U$281  [3810]  104.78,114.05 0 top
U$282  [4119]  87.38,73.03 90 top
U$283  [ATP1]  60.07,88.65 0 top
U$284  [MIC0]  106.05,78.36 0 top
U$285  [364]  103.38,78.49 90 bottom
U$286  [373]  109.47,78.49 90 bottom
U$287  [BYP0]  14.1,101.22 0 top
U$288  [#A332]  69.47,72.77 90 top
U$289  [ATP1]  81.66,88.65 0 bottom
U$290  [3#3V_MAX2]  61.85,80.65 0 top
U$291  [3#3V_MAX2]  87.25,80.65 0 top
U$292  [3#3V_MAX2]  83.57,110.24 0 top
U$293  [DEBUG2]  78.99,84.33 0 top
U$294  [1720]  84.84,71.25 270 bottom
U$295  [4119]  87.38,71.25 270 bottom
U$296  [#4518]  89.92,72.52 270 bottom
U$297  [217]  92.46,70.87 270 bottom
U$298  [116]  95,70.61 270 bottom
U$299  [015]  97.54,70.87 270 bottom
U$300  [#4314]  100.08,72.77 270 bottom
U$301  [#4213]  102.62,72.9 270 bottom
U$302  [140]  79.76,122.3 270 bottom
U$303  [81]  82.3,122.3 270 bottom
U$304  [102]  84.84,122.3 270 bottom
U$305  [93]  87.38,122.3 270 bottom
U$306  [#264]  89.79,122.56 270 bottom
U$307  [155]  92.46,122.43 270 bottom
U$308  [#196]  95,122.68 270 bottom
U$309  [#187]  97.54,122.68 270 bottom
U$310  [38]  108.46,119.13 0 bottom
U$311  [369]  108.71,116.59 0 bottom
U$312  [3810]  108.71,114.05 0 bottom
U$313  [#3711]  108.97,111.51 0 bottom
U$314  [#4412]  108.84,108.97 0 bottom
U$315  [#A357]  69.6,122.56 270 bottom
U$316  [#48]  67.06,122.56 270 bottom
U$317  [#229]  64.52,122.68 270 bottom
U$318  [#2310]  61.98,122.68 270 bottom
U$319  [#2812]  56.9,122.68 270 bottom
U$320  [#2711]  59.31,122.68 270 bottom
U$321  [#A3213]  52.83,122.68 270 bottom
U$322  [#A1214]  50.29,122.56 270 bottom
U$323  [#A1315]  47.75,122.68 270 bottom
U$324  [MOSI7]  45.21,122.3 270 bottom
U$325  [MISO8]  42.67,122.3 270 bottom
U$326  [SCK9]  40.13,122.17 270 bottom
U$327  [SDA0]  32.51,122.3 270 bottom
U$328  [SCL1]  29.97,122.3 270 bottom
U$329  [#A294]  61.98,73.66 270 bottom
U$330  [#A113]  64.52,73.15 270 bottom
U$331  [A342]  67.06,72.77 270 bottom
U$332  [#A332]  69.6,73.79 270 bottom
U$333  [A160]  72.14,72.39 270 bottom
U$334  [#A310]  74.68,73.53 270 bottom
U$335  [RX11]  74.68,122.3 270 bottom
U$336  [TX10]  72.14,122.3 270 bottom
U$337  OSHW-LOGOS  [OSHW-LOGO-S]  120.14,119.63 0 bottom
U$338  [MADEINUSA#PNG]  207.52,88.14 0 bottom
U$339  [QWIIC_COPYRIGHT_SMALL]  212.34,83.57 90 top
U$340  [G1]  123.06,105.03 0 bottom
U$341  [V0]  123.06,110.36 0 bottom
U$342  [D#3]  123.19,106.81 0 bottom
U$343  [D#4]  123.06,108.59 0 bottom
U$344  [ARTEMIS0]  151.64,88.65 0 top
U$345  [ARTEMIS0]  203.2,88.65 0 bottom
U$346  [A160]  178.56,73.79 90 top
U$347  [#48]  173.48,113.16 90 top
U$348  [#229]  170.81,112.14 90 top
U$349  [#2310]  168.4,112.14 90 top
U$350  [#2711]  165.86,112.14 90 top
U$351  [#2812]  163.32,112.14 90 top
U$352  [#A113]  170.94,72.77 90 top
U$353  [#A294]  168.4,72.77 90 top
U$354  [#A310]  181.1,72.77 90 top
U$355  [#A357]  176.02,111.12 90 top
U$356  [#A1214]  156.72,111.12 90 top
U$357  [#A1315]  154.18,111.12 90 top
U$358  [#A3213]  159.26,110.87 90 top
U$359  [A342]  173.48,73.79 90 top
U$360  [MISO8]  149.1,110.87 90 top
U$361  [MOSI7]  151.64,110.87 90 top
U$362  [SCK9]  146.56,111.76 90 top
U$363  [#_#_PWM7]  192.53,107.7 0 top
U$364  [3#3V_MAX2]  158.24,110.24 0 top
U$365  [A_#_ADC6]  195.07,105.16 0 top
U$366  [MEAS3]  146.56,85.34 0 top
U$367  [RX11]  180.97,111.76 90 top
U$368  [TX10]  178.56,111.63 90 top
U$369  [RX01]  130.3,110.74 90 bottom
U$370  [TX00]  127.76,110.74 90 bottom
U$371  [AREF2]  144.53,115.06 0 bottom
U$372  [SCL1]  136.4,111.76 90 top
U$373  [SDA0]  138.94,111.76 90 top
U$374  [#187]  203.96,112.52 90 top
U$375  [#196]  201.42,112.52 90 top
U$376  [#264]  196.34,112.14 90 top
U$377  [#3711]  210.18,111.51 0 top
U$378  [#4213]  209.04,73.03 90 top
U$379  [#4314]  206.5,73.03 90 top
U$380  [#4412]  210.18,108.97 0 top
U$381  [#4518]  196.34,73.03 90 top
U$382  [015]  203.96,73.03 90 top
U$383  [38]  212.09,119.13 0 top
U$384  [81]  188.72,114.17 90 top
U$385  [93]  193.8,114.17 90 top
U$386  [102]  191.26,113.41 90 top
U$387  [116]  201.42,73.03 90 top
U$388  [140]  186.18,113.41 90 top
U$389  [155]  198.88,113.54 90 top
U$390  [217]  198.88,73.03 90 top
U$391  [369]  211.2,116.59 0 top
U$392  [1720]  191.26,73.03 90 top
U$393  [3810]  211.2,114.05 0 top
U$394  [4119]  193.8,73.03 90 top
U$395  [ATP1]  166.5,88.65 0 top
U$396  [MIC0]  212.47,78.36 0 top
U$397  [364]  209.8,78.49 90 bottom
U$398  [373]  215.9,78.49 90 bottom
U$399  [BYP0]  120.52,101.22 0 top
U$400  [#A332]  175.89,72.77 90 top
U$401  [ATP1]  188.09,88.65 0 bottom
U$402  [3#3V_MAX2]  168.27,80.65 0 top
U$403  [3#3V_MAX2]  193.67,80.65 0 top
U$404  [3#3V_MAX2]  189.99,110.24 0 top
U$405  [DEBUG2]  185.42,84.33 0 top
U$406  [1720]  191.26,71.25 270 bottom
U$407  [4119]  193.8,71.25 270 bottom
U$408  [#4518]  196.34,72.52 270 bottom
U$409  [217]  198.88,70.87 270 bottom
U$410  [116]  201.42,70.61 270 bottom
U$411  [015]  203.96,70.87 270 bottom
U$412  [#4314]  206.5,72.77 270 bottom
U$413  [#4213]  209.04,72.9 270 bottom
U$414  [140]  186.18,122.3 270 bottom
U$415  [81]  188.72,122.3 270 bottom
U$416  [102]  191.26,122.3 270 bottom
U$417  [93]  193.8,122.3 270 bottom
U$418  [#264]  196.21,122.56 270 bottom
U$419  [155]  198.88,122.43 270 bottom
U$420  [#196]  201.42,122.68 270 bottom
U$421  [#187]  203.96,122.68 270 bottom
U$422  [38]  214.88,119.13 0 bottom
U$423  [369]  215.14,116.59 0 bottom
U$424  [3810]  215.14,114.05 0 bottom
U$425  [#3711]  215.39,111.51 0 bottom
U$426  [#4412]  215.26,108.97 0 bottom
U$427  [#A357]  176.02,122.56 270 bottom
U$428  [#48]  173.48,122.56 270 bottom
U$429  [#229]  170.94,122.68 270 bottom
U$430  [#2310]  168.4,122.68 270 bottom
U$431  [#2812]  163.32,122.68 270 bottom
U$432  [#2711]  165.73,122.68 270 bottom
U$433  [#A3213]  159.26,122.68 270 bottom
U$434  [#A1214]  156.72,122.56 270 bottom
U$435  [#A1315]  154.18,122.68 270 bottom
U$436  [MOSI7]  151.64,122.3 270 bottom
U$437  [MISO8]  149.1,122.3 270 bottom
U$438  [SCK9]  146.56,122.17 270 bottom
U$439  [SDA0]  138.94,122.3 270 bottom
U$440  [SCL1]  136.4,122.3 270 bottom
U$441  [#A294]  168.4,73.66 270 bottom
U$442  [#A113]  170.94,73.15 270 bottom
U$443  [A342]  173.48,72.77 270 bottom
U$444  [#A332]  176.02,73.79 270 bottom
U$445  [A160]  178.56,72.39 270 bottom
U$446  [#A310]  181.1,73.53 270 bottom
U$447  [RX11]  181.1,122.3 270 bottom
U$448  [TX10]  178.56,122.3 270 bottom
Y1  32.768kHz  [CRYSTAL-SMD-3.2X1.5MM]  92.2,30.61 90 top
Y2  32.768kHz  [CRYSTAL-SMD-3.2X1.5MM]  198.63,30.61 90 top
Y3  32.768kHz  [CRYSTAL-SMD-3.2X1.5MM]  92.2,89.54 90 top
Y4  32.768kHz  [CRYSTAL-SMD-3.2X1.5MM]  198.63,89.54 90 top

## Library data of the parts
BT1-BT4 = SparkFun-Batteries; PROD_ID: PRT-11892; SF_SKU: BATT-10373
BYP BYP1-BYP3 JP12 JP16 JP21 JP22 JP42 JP43 JP49 JP50 JP71 JP72 JP78 JP79 JP100 JP101 JP107 JP108 = SparkFun-Jumpers
C1 C8 C23 C32 C43 C51 C62 C70 = SparkFun-Capacitors; PROD_ID: CAP-08604
C2 C4 C10 C12 C14 C18 C19 C21 C24 C25 C31 C38 C39 C41 C44 C45 C50 C57 C58 C60 C63 C64 C69 C76 = SparkFun-Capacitors; PROD_ID: CAP-00810
C3 C6 C15 C20 C26 C27 C40 C46 C47 C59 C65 C66 = SparkFun-Capacitors; PROD_ID: CAP-00811
C5 C22 C42 C61 = SparkFun-Capacitors; PROD_ID: CAP-08478
C7 C33 C52 C71 = SparkFun-Capacitors; PROD_ID: CAP-11015
C9 C16 C29 C34 C48 C53 C67 C72 = SparkFun-Capacitors; PROD_ID: CAP-00868
C11 C13 C35 C36 C54 C55 C73 C74 = SparkFun-Capacitors; PROD_ID: CAP-07881
C17 C30 C49 C68 = SparkFun-Capacitors; PROD_ID: CAP-00867
C28 C37 C56 C75 = SparkFun-Capacitors; PROD_ID: CAP-07886
D1 D5 D9 D13 = SparkFun-DiscreteSemi; PROD_ID: DIO-08053
D2 D7 D11 D15 LED2 LED3 LED5 LED7 = SparkFun-LED; PROD_ID: DIO-09910
D3 D6 D10 D14 = SparkFun-LED; PROD_ID: DIO-09909
D4 D8 D12 D16 = SparkFun-DiscreteSemi; PROD_ID: DIO-14072
E1-E4 = SparkFun-Sensors; PROD_ID: IC-14361
E$1-E$4 JP1 JP7 JP38 JP39 JP67 JP68 JP96 JP97 LOGO1-LOGO4 U$5 U$16 U$225 U$337 = SparkFun-Aesthetics
E$5 E$6 = SparkFun-Retired
F1-F4 = SparkFun-Fuses; PROD_ID: RES-14313
FRAME1-FRAME4 = SparkFun-Aesthetics; DESIGNER: Nobody; VERSION: v01
IC1-IC4 = Testing; PROD_ID: VREG-08170
J1 J7 J11 J12 J17 J18 J23 J24 JP14 JP25 JP30 JP41 JP51 JP52 JP70 JP80 JP81 JP99 JP109 JP110 TP1-TP12 = SparkFun-Connectors
J2 J10 J16 J22 = SparkFun-Connectors; PROD_ID: CONN-14468
J3 J6 J13 J19 = SparkFun-Connectors; PROD_ID: CONN-08106; SF_ID: PRT-12748
J4 J8 J14 J20 = SparkFun-Connectors; PROD_ID: CONN-13694
J5 J9 J15 J21 = SparkFun-Connectors; PROD_ID: CONN-14122
JP2 JP23 JP36 JP53 JP65 JP82 JP94 JP111 = SparkFun-Connectors; PROD_ID: CONN-11219
JP3-JP6 JP8 JP9 JP15 JP17 JP18 JP31-JP35 JP47 JP48 JP59-JP64 JP76 JP77 JP88-JP93 JP105 JP106 = SparkFun
JP10 JP11 JP13 JP19 JP20 JP24 JP37 JP40 JP44-JP46 JP54 JP66 JP69 JP73-JP75 JP83 JP95 JP98 JP102-JP104 JP112 = SparkFun-Connectors; PROD_ID: CONN-10204
JP26-JP29 JP55-JP58 JP84-JP87 JP113-JP116 = SparkFun-Connectors; PROD_ID: CONN-08438
LED1 LED4 LED6 LED8 = SparkFun-LED; PROD_ID: DIO-09911
Q1-Q4 = SparkFun-DiscreteSemi; PROD_ID: TRANS-11308
R1 R6 R12 R16 R19 R20 R25 R31 R32 R37 R43 R44 = SparkFun-Resistors; PROD_ID: RES-07857
R2 R4 R10 R13 R26 R28 R38 R40 = SparkFun-Resistors; PROD_ID: RES-00824
R3 R11 R27 R39 = SparkFun-Resistors; PROD_ID: RES-07828
R5 R24 R36 R48 = SparkFun-Resistors
R7 R8 R21 R22 R33 R34 R45 R46 = SparkFun-Resistors; PROD_ID: RES-12083
R9 R23 R35 R47 = SparkFun-Resistors; PROD_ID: RES-08969
R14 R17 R29 R41 = SparkFun-Resistors; PROD_ID: RES-07850
R15 R18 R30 R42 = SparkFun-Resistors; PROD_ID: RES-07849
S1-S4 = SparkFun-Switches; PROD_ID: SWCH-14139
U1 U3 U7 U10 = SparkFun-PowerIC; PROD_ID: VREG-12457
U2 U5 U8 U11 = SparkFun-IC-Comms; PROD_ID: IC-14038
U4 U6 U9 U12 = SparkFun-IC-Microcontroller; PROD_ID: SUB-14415
U$1 U$65-U$67 U$69-U$73 U$115 U$116 U$139-U$144 U$178-U$180 U$223 U$224 U$251-U$256 U$290-U$292 U$335 U$336 U$363-U$368 U$402-U$404 U$447 U$448 = buzzard_labels (2)
U$2 U$10 U$118 U$119 U$230 U$231 U$342 U$343 = buzzard_labels (14)
U$3 U$23 U$24 U$32 U$37 U$39-U$46 U$51 U$52 U$54-U$60 U$74 U$75 U$77-U$94 U$150-U$170 U$182-U$202 U$262-U$282 U$294-U$314 U$374-U$394 U$406-U$426 = buzzard_labels (9)
U$4 U$6 U$226 U$338 = madeinusa
U$7 U$9 U$227 U$339 = Labels
U$8 U$11 U$12 U$63 U$64 U$68 U$117 U$173-U$175 U$228 U$229 U$285-U$287 U$340 U$341 U$397-U$399 = buzzard_labels (13)
U$13 U$18 U$22 U$107 U$108 U$112 U$148 U$149 U$176 U$215 U$216 U$220 U$260 U$261 U$288 U$327 U$328 U$332 U$372 U$373 U$400 U$439 U$440 U$444 = buzzard_labels (6)
U$14 U$15 U$49 U$53 U$120 U$121 U$145 U$146 U$232 U$233 U$257 U$258 U$344 U$345 U$369 U$370 = buzzard_labels (3)
U$17 U$113 U$122 U$221 U$234 U$333 U$346 U$445 = buzzard_labels
U$19 U$21 U$25-U$27 U$29-U$31 U$33-U$36 U$38 U$95-U$103 U$109-U$111 U$114 U$123-U$135 U$203-U$211 U$217-U$219 U$222 U$235-U$247 U$315-U$323 U$329-U$331 U$334 U$347-U$359 U$427-U$435 U$441-U$443 U$446 = buzzard_labels (1)
U$20 U$147 U$259 U$371 = buzzard_labels (5)
U$28 U$61 U$171 U$177 U$283 U$289 U$395 U$401 = buzzard_labels (12)
U$47 U$48 U$50 U$104-U$106 U$136-U$138 U$212-U$214 U$248-U$250 U$324-U$326 U$360-U$362 U$436-U$438 = buzzard_labels (8)
U$62 U$172 U$284 U$396 = buzzard_labels (11)
U$76 U$181 U$293 U$405 = buzzard_labels (10)
Y1-Y4 = SparkFun-Clocks; PROD_ID: XTAL-13062